# Altium PCB Raspberry_HAT.PcbDoc
Units mm, origin at the board's own origin, x right, y up, seen from the top; angles counter-clockwise.
Board outline 65 x 33.25 mm, 2 copper layers (Top Layer, Bottom Layer), stack 1.554 mm thick; 12 components, 16 nets, 86 pads, 0 vias.
Unrouted connection lines stored in the file: 6.
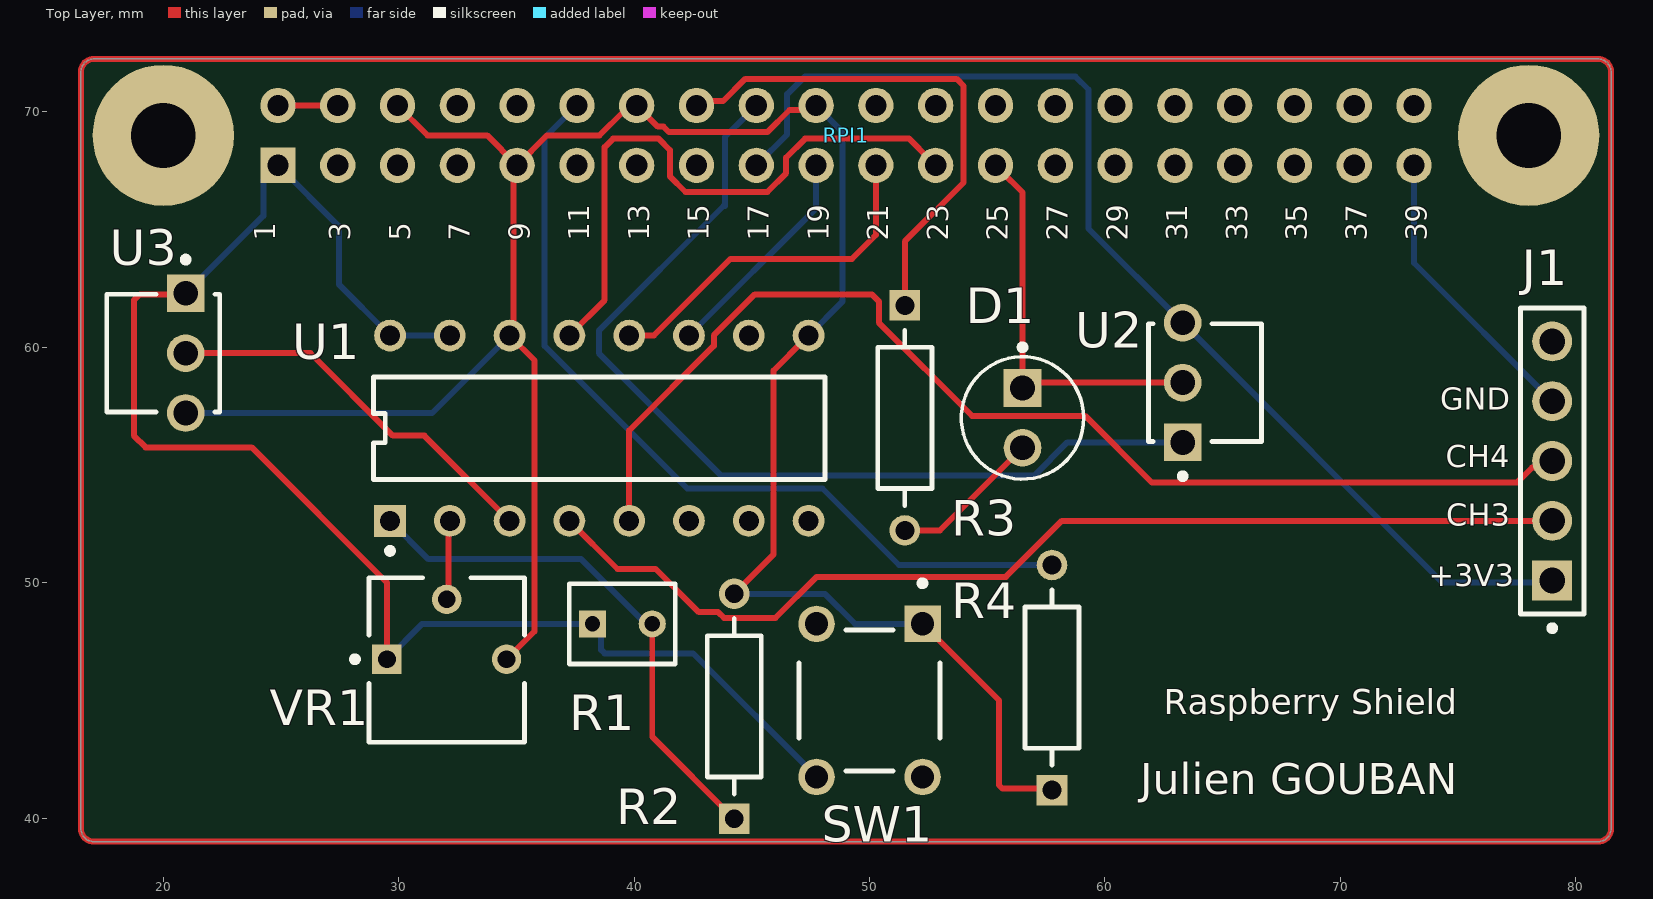
[diagram p0: Top Layer view]
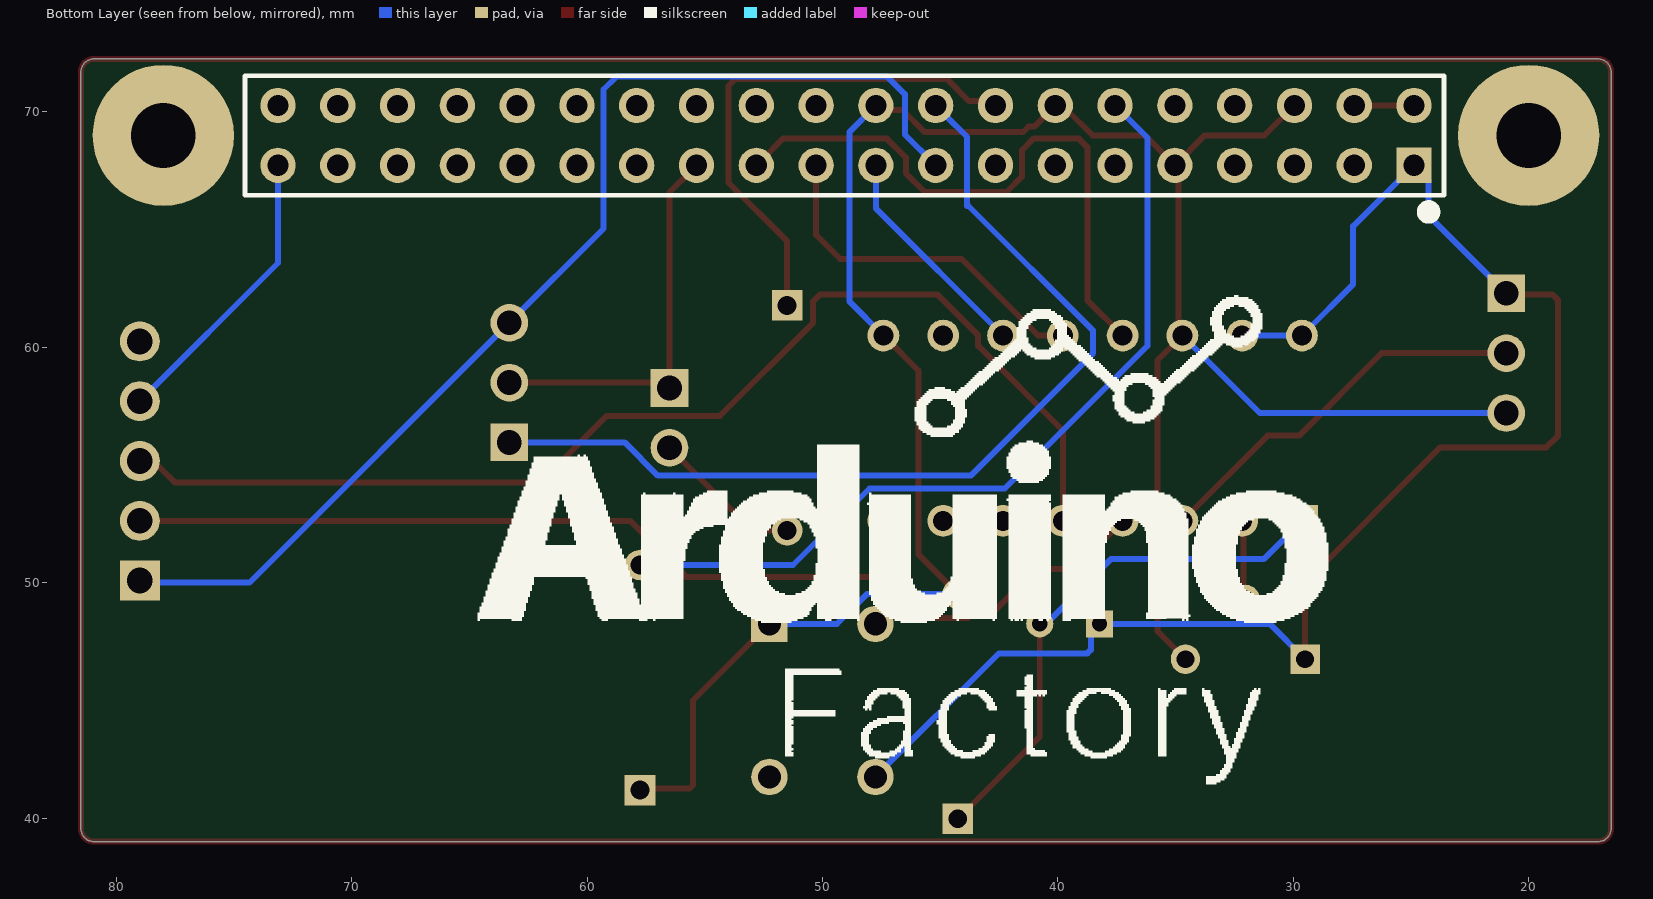
[diagram p1: Bottom Layer view, seen from below]

## Layer stack, top to bottom
Top Solder: solder mask 0.0203, Solder Resist, Dk 3.5
Top Layer: signal copper 0.0533
Dielectric 1: dielectric 1.4478, FR-4, Dk 4.6
Bottom Layer: signal copper 0.0533
Bottom Solder: solder mask 0.0203, Solder Resist, Dk 3.5

## Board outline
16.5,39.554 16.5,71.696 cw(c17.054,71.696) 17.054,72.25 80.946,72.25 cw(c80.946,71.696) 81.5,71.696 81.5,39.554 cw(c80.946,39.554) 80.946,39 17.054,39 cw(c17.054,39.554)

## Design rules (kind name [scope] priority, off if disabled: settings)
Clearance [All] p1: gap=0.254 ignorepadtopadclearanceinfootprint=TRUE except(0: Arc-Hole Track-Hole SMDPad-Hole THPad-Hole Via-Hole Fill-Hole Poly-Hole Region-Hole Text-Hole)
PolygonConnect [All] p1: connectstyle=Relief reliefconductorwidth=0.254 reliefentries=4 polygonreliefangle="90 Angle" airgapwidth=0.254
RoomDefinition Raspberry_HAT [InComponentClass('Raspberry_HAT')] p1: confinementstyle=ConfineIn formatcopy=TRUE lockcomponents=FALSE outline 0,0 50.8,0 50.8,25.4 0,25.4
RoutingVias [All] p1: holewidth=0.711 width=1.27 viastyle="Through Hole" minholewidth=0.711 minwidth=1.27 maxholewidth=0.711 maxwidth=1.27
SolderMaskExpansion [All] p1: expansion=0.102 istentingtop=FALSE
SupplyNets "Schematic Supply Nets_3" [InNet('+3V3')] p1: voltage=0.000
SupplyNets "Schematic Supply Nets_2" [InNet('GND')] p2: voltage=0.000
SupplyNets "Schematic Supply Nets_1" [InNet('+5V')] p3: voltage=0.000
Width [All] p1: maxlimit=0.254 minlimit=0.254 preferedwidth=0.254
30 further rules are at their usual default settings.

## Components (designator, comment, footprint, x,y, rotation, side; value= is the part's Value field where it differs from the comment)
D1 "Diode_Vishay_TLDR4900_eec" Vishay_TLDR4900_0 56.5,57 r270 top
J1 "61300411121" Wurth_61300511121_0 79,55.17 r90 top
R1 "PDV-P9002" Advanced_Photonix_PDV-P9002_0 39.5,48.25 r0 top
R2 "CF14JT10K0" Stackpole_Electronics_Inc._CF14JT1K00_0 44.25,44.75 r90 top
R3 "CF14JT10K0" Stackpole_Electronics_Inc._CF14JT1K00_0 51.5,57 r270 top
R4 "CF14JT10K0" Stackpole_Electronics_Inc._CF14JT1K00_0 57.75,45.97 r90 top
RPI1 "RPI GPIO Connector" RPI 49,69 r180 top
SW1 "Switch_TE_FSM4JH_eec" TE_FSM4JH_0 50,45 r270 top
U1 "IC_Microchip_MCP3008I-P_eec" Microchip_MCP3008I-P_0 38.52,56.563 r90 top
U2 "IC_Vishay_TSOP38238_eec" Vishay_TSOP38238_0 64.25,58.5 r90 top
U3 "TMP36GT9Z" Vishay_TSOP38238_0 20,59.75 r270 top
VR1 "3362P-1-103LF" BOUR-3362P 32.04,46.715 r0 top

## Footprints (in the part's own frame and the unit in brackets; to place one, negate y for a bottom-side part, rotate by r counter-clockwise, add the part's x,y. Pads: shape width x height; smd on the part's side, far side on the other; paste and mask are expansions set on the pad)
Advanced_Photonix_PDV-P9002_0 [mm]
  rect 1.15x1.15 hole 0.65 paste-2539.97 mask+0: 1(-1.27,0)
  round 1.15 hole 0.65 paste-2539.97 mask+0: 2(1.27,0)
  silkscreen extent -2.25,-1.7 2.25,1.7, body extent -2.32,-1.92 2.32,1.92, height 0.25
BOUR-3362P [mm] "THD, 3-Leads, Body 6.6x6.99mm, Pitch 2.54mm"
  rect 1.25x1.25 hole 0.75: 1(-2.54,0.035)
  round 1.25 hole 0.75: 2(0,2.575) 3(2.54,0.035)
  silkscreen extent -4.02,-3.49 3.3,3.5, body extent -3.3,-3.49 3.3,3.49, height 4.95
Microchip_MCP3008I-P_0 [mm]
  rect 1.35x1.35 hole 0.85 paste-2539.97 mask+0: 1(-3.937,8.89)
  round 1.35 hole 0.85 paste-2539.97 mask+0: 2(-3.937,6.35) 3(-3.937,3.81) 4(-3.937,1.27) 5(-3.937,-1.27) 6(-3.937,-3.81) 7(-3.937,-6.35) 8(-3.937,-8.89) 9(3.937,-8.89) 10(3.937,-6.35) 11(3.937,-3.81) 12(3.937,-1.27) 13(3.937,1.27) 14(3.937,3.81) 15(3.937,6.35) 16(3.937,8.89)
  silkscreen extent -5.34,-9.59 2.17,9.59, body extent -4.71,-10.2 4.71,10.2, height 0.25
RPI [mm]
  rect 1.5x1.5 hole 0.9: 1(24.13,1.27)
  round 1.5 hole 0.9: 2(24.13,-1.27) 3(21.59,1.27) 4(21.59,-1.27) 5(19.05,1.27) 6(19.05,-1.27) 7(16.51,1.27) 8(16.51,-1.27) 9(13.97,1.27) 10(13.97,-1.27) 11(11.43,1.27) 12(11.43,-1.27) 13(8.89,1.27) 14(8.89,-1.27) 15(6.35,1.27) 16(6.35,-1.27) 17(3.81,1.27) 18(3.81,-1.27) 19(1.27,1.27) 20(1.27,-1.27) 21(-1.27,1.27) 22(-1.27,-1.27) 23(-3.81,1.27) 24(-3.81,-1.27) 25(-6.35,1.27) 26(-6.35,-1.27) 27(-8.89,1.27) 28(-8.89,-1.27) 29(-11.43,1.27) 30(-11.43,-1.27) 31(-13.97,1.27) 32(-13.97,-1.27) 33(-16.51,1.27) 34(-16.51,-1.27) 35(-19.05,1.27) 36(-19.05,-1.27) 37(-21.59,1.27) 38(-21.59,-1.27) 39(-24.13,1.27) 40(-24.13,-1.27)
  body extent -25.52,-2.63 25.53,2.38, height 8.5
Stackpole_Electronics_Inc._CF14JT1K00_0 [mm]
  rect 1.3x1.3 hole 0.8 paste-2539.97 mask+0: 1(-4.78,0)
  round 1.3 hole 0.8 paste-2539.97 mask+0: 2(4.78,0)
  silkscreen extent -3.73,-1.15 3.73,1.15, body extent -5.53,-1.4 5.53,1.4, height 0.25
TE_FSM4JH_0 [mm]
  rect 1.55x1.55 hole 0.99 paste-2539.97 mask+0: 1(-3.25,2.25)
  round 1.55 hole 0.99 paste-2539.97 mask+0: 2(3.25,2.25) 3(-3.25,-2.25) 4(3.25,-2.25)
  silkscreen extent -5.1,-3 3,3, body extent -4.13,-3.13 4.13,3.13, height 0.25
Vishay_TLDR4900_0 [mm]
  rect 1.6x1.6 hole 1.05 paste-2539.97 mask+0: 1(-1.27,0)
  round 1.6 hole 1.05 paste-2539.97 mask+0: 2(1.27,0)
  silkscreen extent -3.12,-2.6 2.6,2.6
Vishay_TSOP38238_0 [mm]
  rect 1.6x1.6 hole 1.05 paste-2539.97 mask+0: 1(-2.54,0.95)
  round 1.6 hole 1.05 paste-2539.97 mask+0: 2(0,0.95) 3(2.54,0.95)
  silkscreen extent -4.1,-2.4 2.5,2.4, body extent -3.44,-2.5 3.44,2.5, height 0.25
Wurth_61300511121_0 [mm]
  rect 1.7x1.7 hole 1.1 paste-2539.97 mask+0: 1(-5.08,0)
  round 1.7 hole 1.1 paste-2539.97 mask+0: 2(-2.54,0) 3(0,0) 4(2.54,0) 5(5.08,0)
  silkscreen extent -7.22,-1.35 6.5,1.35, body extent -6.6,-1.45 6.6,1.45, height 0.25

## Part data
D1: "DIODE Red 648nm LED Indication - Discrete 1.8V Radial", Digikey Part Number=751-1089-ND, Manufacturer=Vishay, Mouser Part Number=78-TLDR4900, Package=RADIAL, Part Number=TLDR4900, Temperature="-40°C to +100°C", Temperature Range High=+100°C, Temperature Range Low=-40°C, ComponentLink1Description=Upverter, ComponentLink1URL=https://upverter.com/upn/revision/3413b80474b1e1cb/, ComponentLink2Description=Datasheet, ComponentLink2URL=https://upverter.com/datasheet/eb3511e92b833138717dd1aad2a9f7f88fefa88c.pdf, Digikey Description="DIODE Red 648nm LED Indication - Discrete 1.8V Radial", helpURL=https://upverter.com/upn/revision/3413b80474b1e1cb/, Ipc Land Pattern Name=DIORD254W85D320H610, Lead Free=yes, Price=0.284696517124, RoHS=TRUE, Supplier 1=Digi-Key, Supplier 2=Mouser, Supplier Part Number 1=751-1089-ND, Supplier Part Number 2=78-TLDR4900
RPI1: library part "rpi connector", "GPIO Header for Raspberry Pi A+/B+/Pi 2/Pi 3 - 2x20", Manufacturer="SparkFun Electronics", Manufacturer Part Number=PRT-14017, Supplier Part Number 1=1568-1462-ND, Accessory Type=Connector, Category="Development Boards, Kits, Programmers", ComponentLink1Description=https://cdn.sparkfun.com/datasheets/Dev/RaspberryPi/12313.pdf, ComponentLink1URL=https://cdn.sparkfun.com/datasheets/Dev/RaspberryPi/12313.pdf, For Use With/Related Products="Raspberry Pi", Nils Minor=author, nilsminor@web.de=mail, Part Status=Active, Pricing 1="1=1.84 (EUR)", RoHS="RoHS Compliant", Stock 1=150, Supplier 1=Digi-Key
SW1: "SWITCH TACTILE SPST-NO 0.05A 24V", Digikey Part Number=450-1650-ND, Manufacturer=TE, Mouser Part Number=506-FSM4JH, Package=SW_PTH_SPST, Part Number=FSM4JH, Temperature="-35°C to +85°C", Temperature Range High=+85°C, Temperature Range Low=-35°C, Voltage=12, ComponentLink1Description=Upverter, ComponentLink1URL=https://upverter.com/upn/revision/266e2d494f5bd45c/, ComponentLink2Description=Datasheet, ComponentLink2URL=http://www.te.com/commerce/DocumentDelivery/DDEController?Action=srchrtrv&DocNm=1825910&DocType=Customer+Drawing&DocLang=English, Digikey Description="SWITCH TACTILE SPST-NO 0.05A 24V", helpURL=https://upverter.com/upn/revision/266e2d494f5bd45c/, Lead Free=yes, RoHS=TRUE, Supplier 1=Digi-Key, Supplier 2=Mouser, Supplier Part Number 1=450-1650-ND, Supplier Part Number 2=506-FSM4JH
U1: "IC ADC 10BIT 2.7V 8CH SPI 16DIP", Digikey Part Number=MCP3008-I/P-ND, Manufacturer=Microchip, Mouser Part Number=579-MCP3008-I/P, Package=PDIP16, Part Number=MCP3008I/P, Temperature="-40°C to +85°C", Temperature Range High=+85°C, Temperature Range Low=-40°C, ComponentLink1Description=Upverter, ComponentLink1URL=https://upverter.com/upn/revision/d4fed12505406db9/, ComponentLink2Description=Datasheet, ComponentLink2URL=http://ww1.microchip.com/downloads/en/DeviceDoc/21295d.pdf, Configuration=MUX-S/H-ADC, Digikey Description="IC ADC 10BIT 2.7V 8CH SPI 16DIP", helpURL=https://upverter.com/upn/revision/d4fed12505406db9/, Input Type="Pseudo-Differential, Single Ended", Ipc Land Pattern Name=DIP787W46P254L1918H533Q16, Lead Free=yes, RoHS=TRUE, Sampling Rate (Per Second)=200k, Supplier 1=Digi-Key, Supplier 2=Mouser, Supplier Part Number 1=MCP3008-I/P-ND, Supplier Part Number 2=579-MCP3008-I/P
U2: "IC IR RCVR MOD 38KHZ DOME RADIAL", Digikey Part Number=751-1227-ND, Manufacturer=Vishay, Mouser Part Number=782-TSOP38238, Package=PTH_5MM0_4MM8, Part Number=TSOP38238, Temperature="-25°C to +85°C", Temperature Range High=+85°C, Temperature Range Low=-25°C, ComponentLink1Description=Upverter, ComponentLink1URL=https://upverter.com/upn/revision/415f0ba2412af72c/, ComponentLink2Description=Datasheet, ComponentLink2URL=http://www.vishay.com/docs/82491/tsop382.pdf, Digikey Description="IC IR RCVR MOD 38KHZ DOME RADIAL", helpURL=https://upverter.com/upn/revision/415f0ba2412af72c/, Lead Free=yes, Price=0.634955148256, RoHS=TRUE, Supplier 1=Digi-Key, Supplier 2=Mouser, Supplier Part Number 1=751-1227-ND, Supplier Part Number 2=782-TSOP38238
VR1: "Square Trimpot(R) Trimming Potentiometer, 10 KOhm, 300 V, -55 to 125 degC, 3-Pin THD, RoHS, Tube", Case Code (Imperial)=0612, Case Code (Metric)=1632, Case/Package=1206, Max Operating Temperature=125degC, Min Operating Temperature=-25degC, Package Quantity=5000, Power Rating="1 W", Resistance="50 mohm", Tolerance=1%, Voltage Rating="220 mV", ComponentLink1Description="Manufacturer URL", ComponentLink1URL=http://www.bourns.com/, ComponentLink2Description=Datasheet, ComponentLink2URL=http://www.bourns.com/docs/Product-Datasheets/3362.pdf, DatasheetVersion=May-16, Height="0.6 mm", Length="3.2 mm", Mount="Surface Mount", PackageDescription="3-Pin Through Hole Device, Body 6.6 x 6.99 mm, Pitch 2.54 mm", PackageReference=3326P, Packaging="Tape and Reel", PartNumber=3362P-1-103LF, Pins=2, REACH SVHC="No SVHC", RoHSCompliant=True, Width="1.6 mm"

## Free pads (board coordinates)
  round 6 hole 2.75: ""(20,69) ""(78,69)

## Nets (pads, with @x,y where several pads share a name; then routed paths per layer and width w, separated by ;. In a path a pad name is that pad's centre, name@x,y a point inside that pad or via, vN(x,y) a via of type N, cw(c..) or ccw(c..) an arc to the next point about the centre after c; other vN are vias at no path point)
+3V3: J1.1 R1.1 RPI1.1 RPI1.17 SW1.4 U1.15 U1.16 U2.3 U3.1 VR1.1 | length 114.3
  Top Layer w0.254: U3.1@21,62.25 19,62.25 18.75,62 18.75,56.25 19.25,55.75 23.75,55.75 29.5,50 VR1.1 ; U2.3@63.25,61 U2.3@63.34,61
  Bottom Layer w0.254: U3.1 24.247,65.587 24.247,67.107 RPI1.1 27.457,65.143 27.457,62.673 U1.16@29.5,60.63 ; VR1.1 31,48.25 R1.1 ; U1.16 U1.15@32,60.5 ; R1.1@38,48.5 38.601,47.899 38.601,47.149 38.75,47 42.5,47 SW1.4 ; RPI1.17@45.25,67.75 45.25,67.79 46.5,69.04 46.5,70.75 47.25,71.5 58.75,71.5 59.299,70.951 59.299,65.041 U2.3 74.34,50 J1.1@79,50
+5V: RPI1.2 RPI1.4 | length 2.7
  Top Layer w0.254: RPI1.2 27.23,70.27 RPI1.4@27.25,70.25
  Bottom Layer w0.254: RPI1.2 RPI1.2@25.108,70.032
CH3: J1.2 U1.4 | length 45.2
  Top Layer w0.254: U1.4 39.293,50.583 40.917,50.583 42.75,48.75 43.572,48.75 43.823,48.499 45.999,48.499 47.75,50.25 55.792,50.25 58.172,52.63 78.88,52.63 J1.2@79,52.75
CH4: J1.3 U1.5 | length 49.9
  Top Layer w0.254: U1.5 39.79,56.467 43.386,60.063 43.386,60.509 45.127,62.25 50.101,62.25 50.397,61.955 50.397,61.044 54.352,57.089 59.161,57.089 62,54.25 77.5,54.25 78.143,54.893 78.332,54.893 78.75,55.311 J1.3@78.75,55.5
GND: D1.1 J1.4 R2.2 R4.1 RPI1.6 RPI1.9 RPI1.14 RPI1.20 RPI1.25 RPI1.30 RPI1.34 RPI1.39 SW1.1 U1.9 U1.14 U2.2 U3.3 VR1.3 | length 129
  Top Layer w0.254: RPI1.6 31.22,69 33.76,69 35,67.76 35,67.75 34.87,67.62 34.87,60.66 U1.14@34.73,60.52 ; VR1.3 35.766,47.936 35.766,59.444 34.75,60.46 U1.14@34.75,60.5 ; RPI1.9 36.3,69 38.532,69 39.549,70.017 39.983,70.017 RPI1.14@40,70 ; RPI1.14 41.011,69.369 41.25,69.369 41.48,69.139 45.658,69.139 46.599,70.08 47.33,70.08 RPI1.20@47.5,70.25 ; R2.2 45.926,51.206 45.926,59.016 47.25,60.34 U1.9@47.25,60.5 ; SW1.1 55.5,45 55.5,41.399 55.649,41.25 R4.1@57.75,41.25 ; RPI1.25@55.5,67.5 55.58,67.5 56.5,66.58 D1.1 56.73,58.5 U2.2@63.25,58.5
  Bottom Layer w0.254: U3.3 31.42,57.21 U1.14 U1.14@34.75,60.5 ; R2.2@44.25,49.75 44.47,49.53 48.105,49.53 49.385,48.25 SW1.1 ; U1.9 48.861,61.951 48.861,69.139 47.75,70.25 RPI1.20@47.75,70.5 ; RPI1.39@73,67.75 73.13,67.62 73.13,63.58 J1.4
GPIO18: R4.2 RPI1.12 | length 36.2
  Bottom Layer w0.254: RPI1.12 36.194,68.894 36.194,60.063 42.257,54 48,54 51.25,50.75 R4.2
GPIO23: R3.1 RPI1.16 | length 22.4
  Top Layer w0.254: RPI1.16@42.5,70.5 42.54,70.46 43.781,70.46 44.722,71.401 53.7,71.401 54,71.101 54,67 51.5,64.5 R3.1
GPIO24: RPI1.18 U2.1 | length 40.7
  Bottom Layer w0.254: RPI1.18@44.75,70.25 44.783,70.217 44.783,69.863 43.851,68.931 43.851,66 43.797,66 38.5,60.703 38.5,59.75 43.701,54.549 56.989,54.549 58.4,55.96 U2.1
NetD1_2: D1.2 R3.2 | length 6.7
  Top Layer w0.254: R3.2 52.99,52.22 D1.2 56.52,55.75 D1.2@56.75,55.75
Photoresistor: R1.2 R2.1 U1.1 | length 22.8
  Top Layer w0.254: R1.2 40.77,43.45 44.22,40 R2.1@44.25,40
  Bottom Layer w0.254: U1.1 31.256,51 37.75,51 40.329,48.421 40.356,48.421 40.75,48.028 R1.2@40.75,48
Potentiometer: U1.2 VR1.2 | length 3.3
  Top Layer w0.254: U1.2@32,52.5 32.105,52.395 32.105,49.355 VR1.2
"SPI0 MISO": RPI1.21 U1.12 | length 15.6
  Top Layer w0.254: U1.12 39.799,60.509 40.846,60.509 44.087,63.75 49.25,63.75 50.27,64.77 RPI1.21 50.27,67.77 RPI1.21@50.5,68
"SPI0 MOSI": RPI1.19 U1.11 | length 9.5
  Bottom Layer w0.254: U1.11 47.73,65.9 RPI1.19 RPI1.19@47.75,67.75
"SPI0 SCLK": RPI1.23 U1.13 | length 26
  Top Layer w0.254: U1.13 38.75,62 38.75,68.5 39.111,68.861 41.04,68.861 41.519,68.382 41.519,67.262 42.182,66.599 45.658,66.599 46.46,67.401 46.46,68.059 47.262,68.861 51.679,68.861 52.54,68 RPI1.23@52.75,68
"SPIO0 CS0": RPI1.24 U1.10
TEMP_Sensor: U1.3 U3.2 | length 16.7
  Top Layer w0.254: U3.2 26.25,59.75 29.75,56.25 31.086,56.25 34.586,52.75 U1.3@34.75,52.75
pads on no net: J1.5 RPI1.3 RPI1.5 RPI1.7 RPI1.8 RPI1.10 RPI1.11 RPI1.13 RPI1.15 RPI1.22 RPI1.26 RPI1.27 RPI1.28 RPI1.29 RPI1.31 RPI1.32 RPI1.33 RPI1.35 RPI1.36 RPI1.37 RPI1.38 RPI1.40 SW1.2 SW1.3 U1.6 U1.7 U1.8
copper on no net: | length 195.5
  Top Layer w0.254: 16.5,39.554 ccw(c17.054,39.554) 17.054,39 80.946,39 ccw(c80.946,39.554) 81.5,39.554 81.5,71.696 ccw(c80.946,71.696) 80.946,72.25 17.054,72.25 ccw(c17.054,71.696) 16.5,71.696 16.5,39.554

## Silkscreen, mask and mechanical layers (free items; w line width, h text height)
Top Overlay:
  text "1" at 24.765,64.52 h0.89 r90
  text "3" at 27.94,64.52 h0.89 r90
  text "5" at 30.48,64.52 h0.89 r90
  text "7" at 33.02,64.52 h0.89 r90
  text "9" at 35.56,64.52 h0.89 r90
  text "11" at 38.1,64.52 h0.89 r90
  text "13" at 40.64,64.52 h0.89 r90
  text "15" at 43.18,64.52 h0.89 r90
  text "17" at 45.72,64.52 h0.89 r90
  text "19" at 48.26,64.52 h0.89 r90
  text "21" at 50.8,64.52 h0.89 r90
  text "23" at 53.34,64.52 h0.89 r90
  text "25" at 55.88,64.52 h0.89 r90
  text "27" at 58.42,64.52 h0.89 r90
  text "29" at 60.96,64.52 h0.89 r90
  text "31" at 63.5,64.52 h0.89 r90
  text "33" at 66.04,64.52 h0.89 r90
  text "35" at 68.58,64.52 h0.89 r90
  text "37" at 71.12,64.52 h0.89 r90
  text "39" at 73.66,64.52 h0.89 r90
  text "GND" at 74.25,57.021 h1.62
  text "CH4" at 74.467,54.596 h1.62
  text "CH3" at 74.499,52.098 h1.62
  text "+3V3" at 73.75,49.521 h1.62
  text "Raspberry Shield" at 62.5,44.054 h1.82
  text "Julien GOUBAN" at 61.504,41.004 h1.32
Bottom Overlay:
  drawing of 15 lines, arcs and shapes, not listed
M2: Outline:
  lines w0.254: 16.5,69 16.5,39 16.75,38.75